# Altium PCB MeArm.PcbDoc
Units mm, origin at the board's own origin, x right, y up, seen from the top; angles counter-clockwise.
Board outline 200 x 200 mm, 2 copper layers (Top Layer, Bottom Layer); 39 components, 37 nets, 138 pads, 0 vias.
Unrouted connection lines stored in the file: 92.
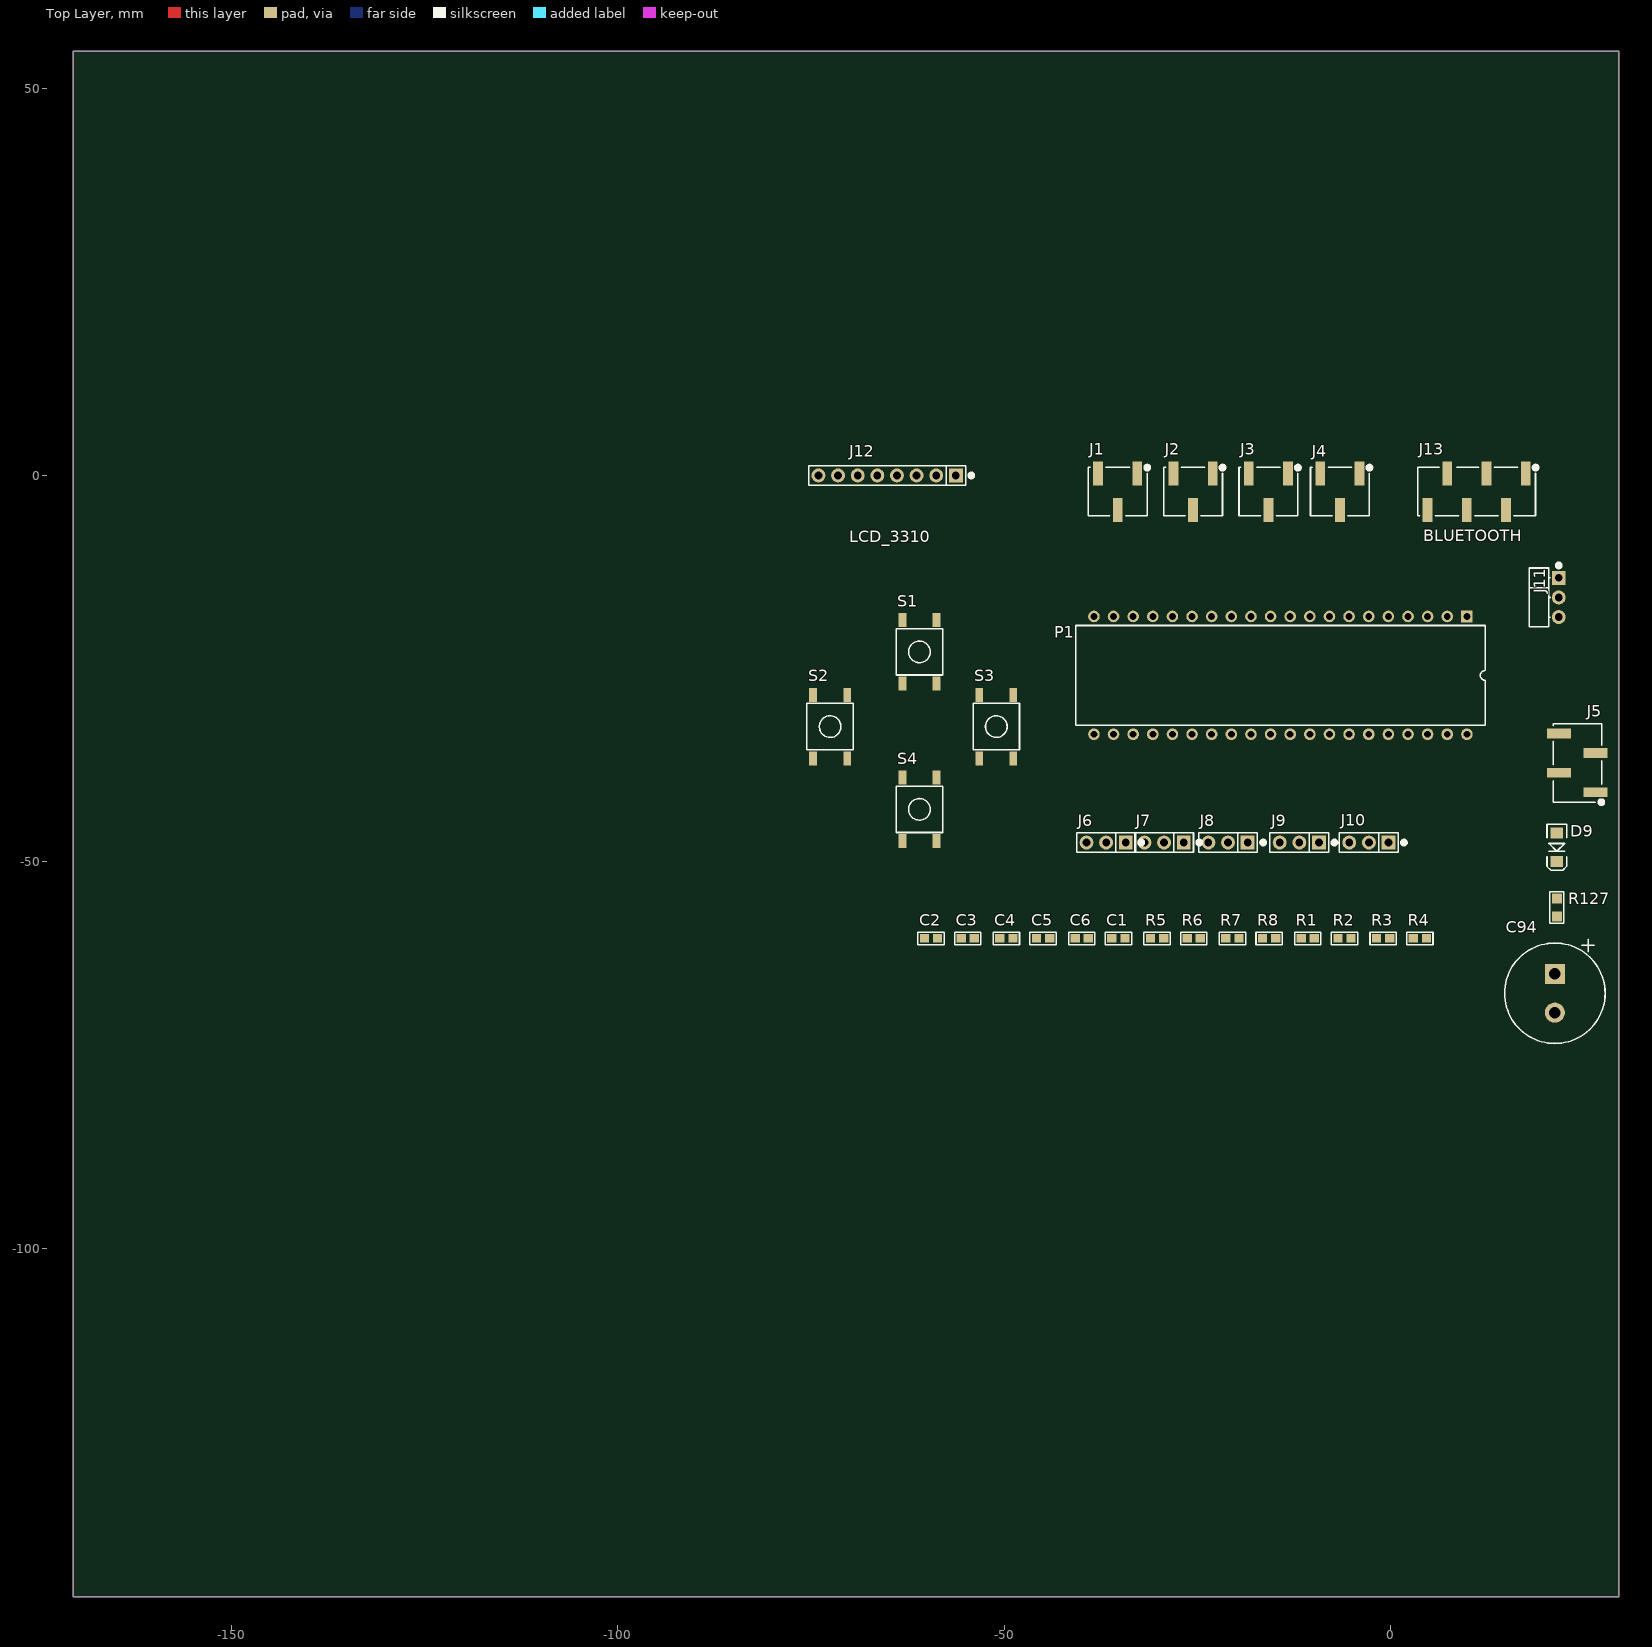
[diagram p0: Top Layer view]
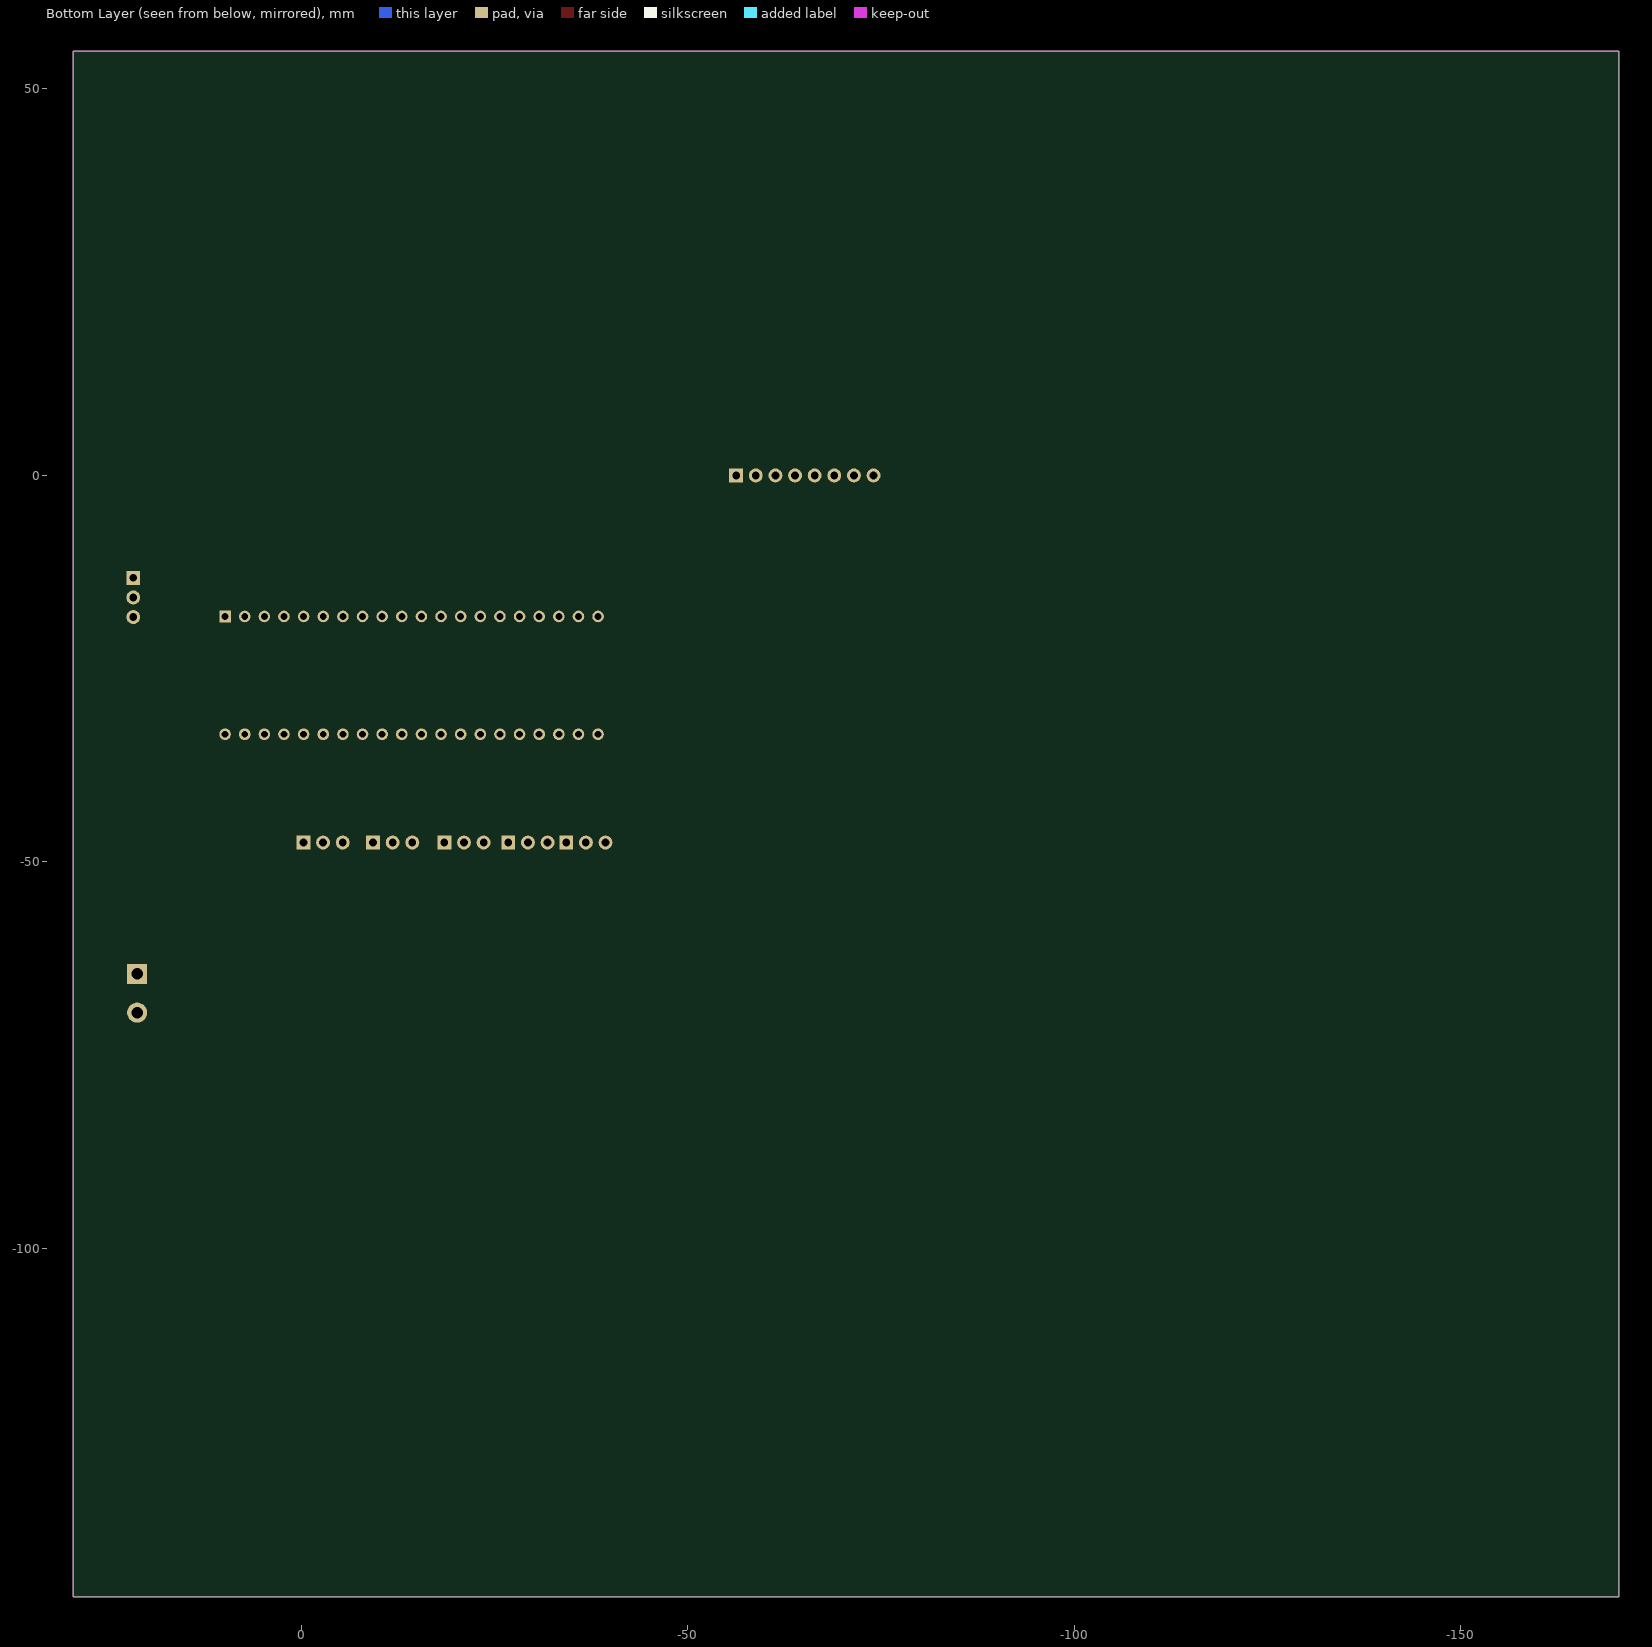
[diagram p1: Bottom Layer view, seen from below]

## Layer stack, top to bottom
Top Solder: solder mask 0.0102, Solder Resist, Dk 3.5
Top Layer: signal copper 0.0356
Dielectric1: prepreg 0.32, FR-4, Dk 4.8
Bottom Layer: signal copper 0.0356
Bottom Solder: solder mask 0.0102, Solder Resist, Dk 3.5

## Board outline
-170.445,-145.1 -170.445,54.9 29.555,54.9 29.555,-145.1

## Design rules (kind name [scope] priority, off if disabled: settings)
Clearance [All] p1 off: gap=0.2 ignorepadtopadclearanceinfootprint=FALSE
ComponentClearance [All] p1 off: gap=0.254 collisioncheckmode=3 verticalgap=0.254 showdistances=FALSE
DiffPairsRouting [All] p1 off: maxlimit=0.254 minlimit=0.254 mostfreqgap=0.254 toplayer_minwidth=0.381 toplayer_maxwidth=0.381 toplayer_prefwidth=0.381 bottomlayer_minwidth=0.381 bottomlayer_maxwidth=0.381 bottomlayer_prefwidth=0.381 maxuncoupledlength=12.7
FabricationTestPointUsage TestPointUsage [All] p1 off: valid=0 allowmultiple=FALSE
FabricationTestpoint Testpoint [(IsPad And (OnTopLayer Or OnBottomLayer))] p1 off: side=3 testpointundercomponent=TRUE minsize=1.016 maxsize=2.54 preferedsize=1.524 minholesize=0 maxholesize=1.016 preferedholesize=0.813 testpointgrid=0.025 allowsidetop=TRUE allowsidebottom=TRUE usegrid=TRUE gridtolerance=0
FanoutControl Fanout_BGA [IsBGA] p1 off: bgadir=Out bgaviamode=Centered fanoutstyle=Auto fanoutdirection=Alternating viagrid=0.025 // Fanout_BGA (Default Rule)
FanoutControl Fanout_LCC [IsLCC] p2 off: bgadir=Out bgaviamode=Centered fanoutstyle=Auto fanoutdirection=Alternating viagrid=0.025 // Fanout_LCC (Default Rule)
FanoutControl Fanout_SOIC [IsSOIC] p3 off: bgadir=Out bgaviamode=Centered fanoutstyle=Auto fanoutdirection=Alternating viagrid=0.025 // Fanout_SOIC (Default Rule)
FanoutControl Fanout_Small [(CompPinCount < 5)] p4 off: bgadir=Out bgaviamode=Centered fanoutstyle=Auto fanoutdirection=OutThenIn viagrid=0.025 // Fanout_Small (Default Rule)
FanoutControl Fanout_Default [All] p5 off: bgadir=Out bgaviamode=Centered fanoutstyle=Auto fanoutdirection=Alternating viagrid=0.025 // Fanout_Default (Default Rule)
Height [All] p1 off: minheight=0 maxheight=25.4 prefheight=12.7
HoleSize [All] p1 off: absolutevalues=TRUE maxlimit=10 minlimit=0.2 maxpercent=80.000 minpercent=20.000
HoleToHoleClearance [All] p1: gap=0.2 allowstackedmicrovias=TRUE
LayerPairs [All] p1 off: enforce=TRUE
MinimumSolderMaskSliver [All] p1: minsoldermaskwidth=0.1
PasteMaskExpansion [All] p1 off: expansion=0
PlaneClearance [All] p1 off: clearance=0.2
PlaneConnect [All] p1 off: planeconnectstyle=Relief reliefexpansion=0.5 reliefentries=4 reliefconductorwidth=0.2 reliefairgap=0.2
PolygonConnect [All] p1 off: connectstyle=Relief reliefconductorwidth=0.2 reliefentries=4 polygonreliefangle="90 Angle" airgapwidth=0.254
RoutingCorners [All] p1 off: cornerstyle=45-Degree minsetback=2.54 maxsetback=2.54
RoutingLayers [All] p1 off: top layer_v5=TRUE bottom layer_v5=TRUE
RoutingPriority [All] p1 off: routingpriority=0
RoutingTopology [All] p1 off: topology=Shortest
RoutingVias [All] p1 off: holewidth=0.5 width=1 viastyle="Through Hole" minholewidth=0.22 minwidth=0.5 maxholewidth=18 maxwidth=20
ShortCircuit [All] p1 off: allowed=FALSE
SilkToSilkClearance [All] p1: silktosilkclearance=0.2
SilkToSolderMaskClearance SilkscreenOverComponentPads [IsPad] p1: minsilkscreentomaskgap=0.1 clearancetoexposedcopper=TRUE
SolderMaskExpansion [All] p1 off: expansion=0.1 istentingtop=FALSE
UnRoutedNet [All] p1 off:
Width [All] p1 off: maxlimit=20 minlimit=0.2 preferedwidth=0.25 minimp=50.000000 maximp=50.000000 favimp=50.000000
5 further rules are at their usual default settings.

## Classes and differential pairs
component class MeArm: C1 C2 C3 C4 C5 C6 C94 D9 J1 J2 J3 J4 J5 J6 J7 J8 J9 J10 J11 J12 J13 J? P1 R1 R2 R3 R4 R5 R6 R7 R8 R127 S1 S2 S3 S4

## Components (designator, comment, footprint, x,y, rotation, side; value= is the part's Value field where it differs from the comment)
1 "" !_ZYGZAK -1021.449,-921.296 r90 top
C1 "100nF" 0603 -36.048,-59.902 r0 top
C2 "10uF" 0603 -60.298,-59.902 r0 top
C3 "100nF" 0603 -55.548,-59.902 r0 top
C4 "100nF" 0603 -50.548,-59.902 r0 top
C5 "100nF" 0603 -45.798,-59.902 r0 top
C6 "100nF" 0603 -40.798,-59.902 r0 top
C94 "0,33F" "kond elektrolit supercap 13x7" 21.27,-64.5 r270 top
D9 "BAS85" "SOD-80 (MINIMELF)" 21.52,-46.25 r270 top
J1 "Servo 1" "z-goldpin 1x3 P 2.54 SMD" -32.75,0.25 r0 top
J2 "Servo 2" "z-goldpin 1x3 P 2.54 SMD" -23,0.25 r0 top
J3 "Servo 3" "z-goldpin 1x3 P 2.54 SMD" -13.25,0.25 r0 top
J4 "Servo 4" "z-goldpin 1x3 P 2.54 SMD" -4,0.25 r0 top
J5 "Konsola" "z-goldpin 1x4 P 2.54 SMD" 26.52,-41 r270 top
J6 "Potencjometr 0" "z-goldpin 1x3 P 2.54 THT" -34.25,-47.5 r0 top
J7 "Potencjometr 1" "z-goldpin 1x3 P 2.54 THT" -26.75,-47.5 r0 top
J8 "Potencjometr 2" "z-goldpin 1x3 P 2.54 THT" -18.48,-47.5 r0 top
J9 "Potencjometr 3" "z-goldpin 1x3 P 2.54 THT" -9.25,-47.5 r0 top
J10 "Potencjometr 4" "z-goldpin 1x3 P 2.54 THT" -0.25,-47.5 r0 top
J11 "WS2812B" "z-goldpin 1x3 K 2.54 THT" 21.77,-13.25 r90 top
J12 "LCD_3310" "z-goldpin 1x8 P 2.54 THT" -56.23,0 r0 top
J13 "BLUETOOTH" "z-goldpin 1x6 P 2.54 SMD" 17.5,0.25 r0 top
P1 "Header 20X2" 40P6 -14.24,-25.87 r180 top
R1 "4,7k" 0603 -11.548,-59.902 r0 top
R2 "4,7k" 0603 -6.798,-59.902 r0 top
R3 "4,7k" 0603 -1.798,-59.902 r0 top
R4 "4,7k" 0603 2.952,-59.902 r0 top
R5 "100R" 0603 -31.048,-59.902 r0 top
R6 "100R" 0603 -26.298,-59.902 r0 top
R7 "100R" 0603 -21.298,-59.902 r0 top
R8 "100R" 0603 -16.548,-59.902 r0 top
R127 "1k" 0805 21.52,-54.75 r270 top
S1 "przycisk monostabilny" "mikroprzel SMD (TME: TACTM-69N-F)" -60.945,-22.825 r90 top
S2 "przycisk monostabilny" "mikroprzel SMD (TME: TACTM-69N-F)" -72.5,-32.5 r90 top
S3 "przycisk monostabilny" "mikroprzel SMD (TME: TACTM-69N-F)" -51,-32.5 r90 top
S4 "przycisk monostabilny" "mikroprzel SMD (TME: TACTM-69N-F)" -60.945,-43.2 r90 top
? "" !_ZYGZAK -1041.642,-867.271 r0 top
? "" !_ZYGZAK -1058.559,-842.866 r180 bottom
? "" !_ZYGZAK -1024.279,-906.809 r135 bottom

## Footprints (in the part's own frame and the unit in brackets; to place one, negate y for a bottom-side part, rotate by r counter-clockwise, add the part's x,y. Pads: shape width x height; smd on the part's side, far side on the other; paste and mask are expansions set on the pad)
40P6 [mm] "DIP; 40 Leads; Row Spacing 15.24 mm; Pitch 2.54 mm"
  rect 1.5x1.5 hole 0.9: 1(-24.13,-7.62)
  round 1.5 hole 0.9: 2(-21.59,-7.62) 3(-19.05,-7.62) 4(-16.51,-7.62) 5(-13.97,-7.62) 6(-11.43,-7.62) 7(-8.89,-7.62) 8(-6.35,-7.62) 9(-3.81,-7.62) 10(-1.27,-7.62) 11(1.27,-7.62) 12(3.81,-7.62) 13(6.35,-7.62) 14(8.89,-7.62) 15(11.43,-7.62) 16(13.97,-7.62) 17(16.51,-7.62) 18(19.05,-7.62) 19(21.59,-7.62) 20(24.13,-7.62) 21(24.13,7.62) 22(21.59,7.62) 23(19.05,7.62) 24(16.51,7.62) 25(13.97,7.62) 26(11.43,7.62) 27(8.89,7.62) 28(6.35,7.62) 29(3.81,7.62) 30(1.27,7.62) 31(-1.27,7.62) 32(-3.81,7.62) 33(-6.35,7.62) 34(-8.89,7.62) 35(-11.43,7.62) 36(-13.97,7.62) 37(-16.51,7.62) 38(-19.05,7.62) 39(-21.59,7.62) 40(-24.13,7.62)
  silkscreen extent -26.5,-6.45 26.5,6.45
0603 [mm] "SMD 0603 (0,1W)"
  rect 1.2x1.1 smd: 1(0,0) 2(1.7,0)
  silkscreen extent -0.85,-0.8 2.55,0.8, body extent 0.05,-0.41 1.65,0.39, height 0.43
0805 [mm] "SMD 0805 (0,125W)"
  rect 1.3x1.3 smd: 1(0,0) 2(2.3,0)
  silkscreen extent -0.9,-0.9 3.2,0.9, body extent 0.15,-0.64 2.15,0.62, height 0.61
!_ZYGZAK [mm]
"kond elektrolit supercap 13x7" [mm]
  rect 2.6x2.6 hole 1.5: 1(0,0)
  round 2.6 hole 1.5: 2(5,0)
  silkscreen extent -4.5,-6.5 9,6.5
"mikroprzel SMD (TME: TACTM-69N-F)" [mm] "Mikroprze³¹cznik SPST-NO 6x6mm (TME: TACTM-69N-F)"
  rect 1.8x1 smd: 1(-4.1,2.2) 1(4.1,2.2) 2(-4.1,-2.2) 2(4.1,-2.2)
  silkscreen extent -3,-3 3,3
"SOD-80 (MINIMELF)" [mm]
  rect 1.4x1.6 smd: 1(0,0) 2(3.7,0)
  silkscreen extent -1.14,-1.27 4.84,1.27, body extent 0,-0.79 3.7,0.79, height 1.6
"z-goldpin 1x3 K 2.54 THT" [mm]
  rect 1.8x1.8 hole 1: 1(0,0)
  round 1.8 hole 1: 2(-2.54,0) 3(-5.08,0)
  silkscreen extent -6.35,-0.25 1.85,3.81
"z-goldpin 1x3 P 2.54 SMD" [mm] "goldpiny smd"
  rect 1.27x3.1 smd: 1(0,0) 2(-2.54,-4.699) 3(-5.08,0)
  silkscreen extent -6.35,-5.46 1.52,1.01
"z-goldpin 1x3 P 2.54 THT" [mm] "goldpiny"
  rect 1.8x1.8 hole 1: 1(0,0)
  round 1.8 hole 1: 2(-2.54,0) 3(-5.08,0)
  silkscreen extent -6.35,-1.27 2.25,1.27
"z-goldpin 1x4 P 2.54 SMD" [mm] "goldpiny smd"
  rect 1.27x3.1 smd: 1(0,0) 2(-2.54,-4.699) 3(-5.08,0) 4(-7.62,-4.699)
  silkscreen extent -8.89,-5.46 1.52,1.01
"z-goldpin 1x6 P 2.54 SMD" [mm] "goldpiny smd"
  rect 1.27x3.1 smd: 1(0,0) 2(-2.54,-4.699) 3(-5.08,0) 4(-7.62,-4.699) 5(-10.16,0) 6(-12.7,-4.699)
  silkscreen extent -13.97,-5.46 1.52,1.01
"z-goldpin 1x8 P 2.54 THT" [mm] "goldpiny"
  rect 1.8x1.8 hole 1: 1(0,0)
  round 1.8 hole 1: 2(-2.54,0) 3(-5.08,0) 4(-7.62,0) 5(-10.16,0) 6(-12.7,0) 7(-15.24,0) 8(-17.78,0)
  silkscreen extent -19.05,-1.27 2.25,1.27

## Part data
C1 C2 C3 C4 C5 C6: library part kondensator, "kondensator"
C94: library part "CAP POL"
D9: library part "DIODA SCHOTTKY", "Schottky Diode"
J1 J2 J3 J4 J6 J7 J8 J9 J10 J11: library part "zlacze 3pin"
J5: library part "zlacze 4pin"
J12: library part "zlacze 8pin"
J13: library part "zlacze 6pin"
P1: "Header, 20-Pin, Dual row"
R1 R2 R3 R4 R5 R6 R7 R8: library part rezystor, "rezystor"
R127: library part "Rezystor SMD"
S1 S2 S3 S4: "Switch, microswitch"

## Nets (pads, with @x,y where several pads share a name; then routed paths per layer and width w, separated by ;. In a path a pad name is that pad's centre, name@x,y a point inside that pad or via, vN(x,y) a via of type N, cw(c..) or ccw(c..) an arc to the next point about the centre after c; other vN are vias at no path point)
+3,3V: C1.2 D9.1 J6.1 J7.1 J8.1 J9.1 J10.1 J12.1 P1.18 P1.40 R1.2 R2.2 R3.2 R4.2
+5V: J1.1 J3.1 J4.1 J11.2 J13.5 P1.38
ADC_0: J6.2 P1.5
ADC_1: J7.2 P1.6
ADC_2: J8.2 P1.7
ADC_3: J9.2 P1.8
ADC_4: J10.2 P1.9
D/C_LCD: J12.4 P1.21
ENABLE_BT: J13.6 P1.13
GND: C1.1 C2.2 C3.1 C4.1 C5.1 C6.1 C94.2 J1.3 J3.3 J4.3 J5.4 J6.3 J7.3 J8.3 J9.3 J10.3 J11.1 J12.6 J13.4 P1.19 P1.20 P1.39 S1.1 S2.1 S3.1 S4.1
NetC2_1: C2.1 J12.7
NetC3_2: C3.2 R5.1
NetC4_2: C4.2 R6.1
NetC5_2: C5.2 R7.1
NetC6_2: C6.2 R8.1
NetD9_2: D9.2 R127.1
PWM_CH1: J1.2 P1.37
PWM_CH2: J2.2 P1.36
PWM_CH3: J3.2 P1.35
PWM_CH4: J4.2 P1.34
RES_LCD: J12.8 P1.22
RESET: P1.17
SPI1_CS/MCO: J12.5 P1.25
SPI1_MISO: P1.11
SPI1_MOSI_LCD: J12.3 P1.12
SPI1_SCK_LCD: J12.2 P1.10
SPI2_MOSI_WS2812B: J11.3 P1.24
STATE_BT: J13.1 P1.14
SW_1: P1.33 R1.1 R5.2 S1.2
SW_2: P1.32 R2.1 R6.2 S2.2
SW_3: P1.31 R3.1 R7.2 S3.2
SW_4: P1.30 R4.1 R8.2 S4.2
USART1_RXD_KONSOLA: J5.1 P1.27
USART1_TXD_KONSOLA: J5.3 P1.26
USART3_RXD_BT: J13.3 P1.16
USART3_TXD_BT: J13.2 P1.15
VBAT: C94.1 P1.1 R127.2
pads on no net: J2.1 J2.3 J5.2 P1.2 P1.3 P1.4 P1.23 P1.28 P1.29

## Keep-outs
Keep-Out Layer:
  the board outline again, w0.2

## Silkscreen, mask and mechanical layers (free items; w line width, h text height)
Mechanical 1:
  the board outline again, w0.2

## Dimensions
29.555,-145.1 to -170.445,-145.1 on Mechanical 1
-170.445,-145.1 to -170.445,54.9 on Mechanical 1